# Altium PCB DS18B20.PcbDoc
Units mm, origin at the board's own origin, x right, y up, seen from the top; angles counter-clockwise.
Board outline 152.4 x 101.6 mm, 2 copper layers (Top Layer, Bottom Layer); 3 components, 3 nets, 9 pads, 0 vias.
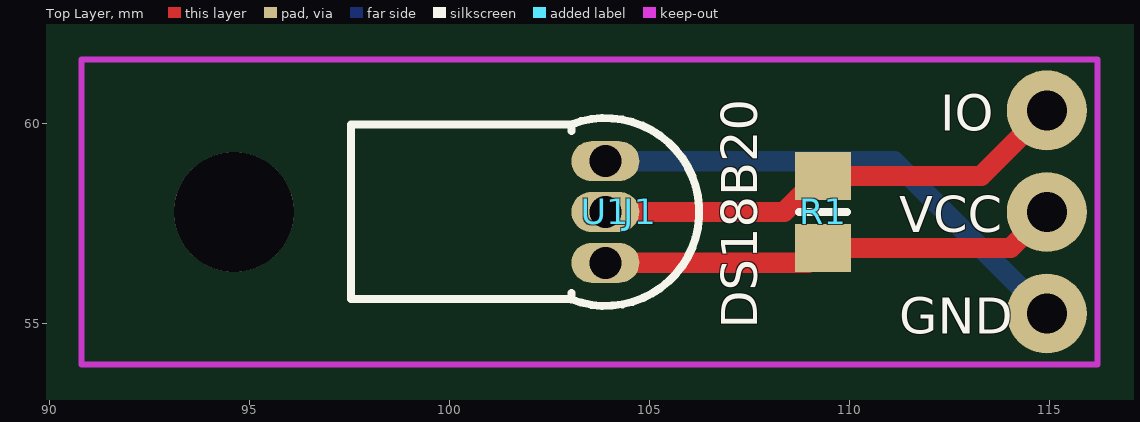
[diagram p0: Top Layer view]
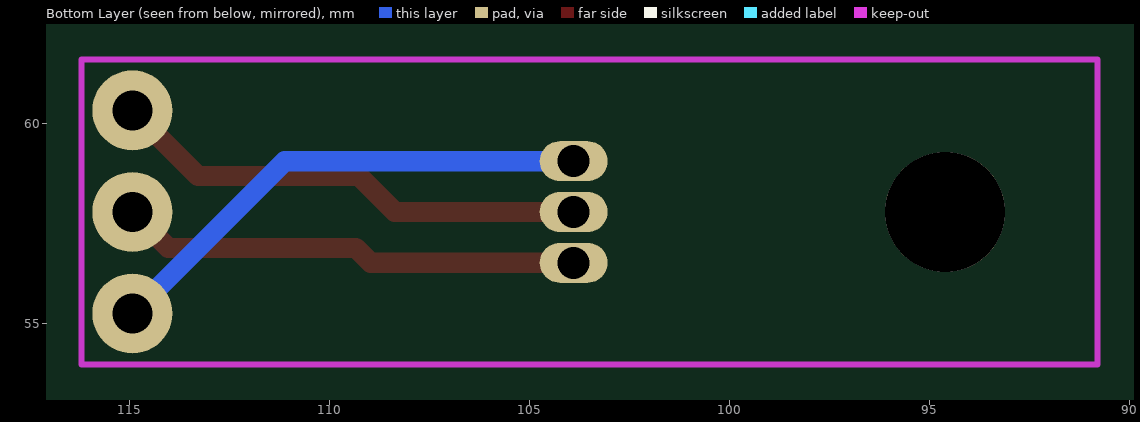
[diagram p1: Bottom Layer view, seen from below]

## Layer stack, top to bottom
Top Solder: solder mask 0.0102, Solder Resist, Dk 3.5
Top Layer: signal copper 0.0356
Dielectric 1: dielectric 0.32, FR-4, Dk 4.8
Bottom Layer: signal copper 0.0356
Bottom Solder: solder mask 0.0102, Solder Resist, Dk 3.5

## Board outline
25.4,25.4 177.8,25.4 177.8,127 25.4,127

## Design rules (kind name [scope] priority, off if disabled: settings)
Clearance [All] p1: gap=0.152
ComponentClearance [All] p1: gap=0 collisioncheckmode=3 verticalgap=0 showdistances=FALSE
PolygonConnect [All] p1: connectstyle=Relief reliefconductorwidth=0.254 reliefentries=4 polygonreliefangle="90 Angle" airgapwidth=0.254
RoutingVias [All] p1: holewidth=0.711 width=1.27 viastyle="Through Hole" minholewidth=0.711 minwidth=1.27 maxholewidth=0.711 maxwidth=1.27
SolderMaskExpansion [All] p1: expansion=0.102
Width [All] p1: maxlimit=2.54 minlimit=0.152 preferedwidth=0.254
28 further rules are at their usual default settings.

## Components (designator, comment, footprint, x,y, rotation, side; value= is the part's Value field where it differs from the comment)
J1 "CON3" DevModule 103.505,57.785 r0 top
R1 "4.7K" 6-0805_N 109.347,57.785 r270 top
U1 "DS1820" PR35 103.901,57.785 r180 top

## Footprints (in the part's own frame and the unit in brackets; to place one, negate y for a bottom-side part, rotate by r counter-clockwise, add the part's x,y. Pads: shape width x height; smd on the part's side, far side on the other; paste and mask are expansions set on the pad)
6-0805_N [mm] "Chip Resistor, Body 2.0x1.2mm, IPC Medium Density"
  rect 1.2x1.4 smd: 1(-0.9,0) 2(0.9,0)
  silkscreen extent 0,-0.6 0,0.6, body extent -1.07,-0.7 1.07,0.7, height 0.7
DevModule [mm]
  round 3 hole 3: 0(-8.89,0)
  round 2 hole 1: 1(11.43,2.54) 2(11.43,0) 3(11.43,-2.54)
  Keep-Out Layer lines w0.152: -12.7,-3.81 -12.7,3.81 12.7,3.81 12.7,-3.81 -12.7,-3.81
PR35 [mm] "TO, Flat Index; 3 In-Line, Axial Leads; Body Dia. 4.6mm; Leads 0.56 x 0.51 mm (max)"
  oval 1.7x1 hole 0.8: 1(0,-1.27) 2(0,0) 3(0,1.27)
  silkscreen extent -2.34,-2.35 0.85,2.35

## Part data
J1: "Connector"
R1: library part RES1_1
U1: "1-Wire Digital Thermometer"

## Nets (pads, with @x,y where several pads share a name; then routed paths per layer and width w, separated by ;. In a path a pad name is that pad's centre, name@x,y a point inside that pad or via, vN(x,y) a via of type N, cw(c..) or ccw(c..) an arc to the next point about the centre after c; other vN are vias at no path point)
GND: J1.3 U1.1 | length 12.6
  Bottom Layer w0.508: U1.1 111.125,59.055 J1.3
NetJ1_1: J1.1 R1.1 U1.2 | length 12.1
  Top Layer w0.508: U1.2 108.372,57.785 109.272,58.685 R1.1 113.295,58.685 J1.1
VCC: J1.2 R1.2 U1.3 | length 11.6
  Top Layer w0.508: U1.3 108.977,56.515 R1.2 114.035,56.885 J1.2
pads on no net: J1.0

## Silkscreen, mask and mechanical layers (free items; w line width, h text height)
Top Overlay:
  lines w0.2: 103.049,59.972 97.536,59.972 97.536,55.765 97.536,55.605 103.051,55.605
  text "IO" at 112.268,59.817 h0.9
  text "VCC" at 111.252,57.277 h0.9
  text "DS18B20" at 107.696,54.864 h0.9 r90
  text "GND" at 111.252,54.737 h0.9